# Altium PCB BQ51013BPCB.PcbDoc
Units mil, origin at the board's own origin, x right, y up, seen from the top; angles counter-clockwise.
Board outline 1016.7 x 608.18 mil, 2 copper layers (Top Layer, Bottom Layer); 31 components, 18 nets, 92 pads, 58 vias.
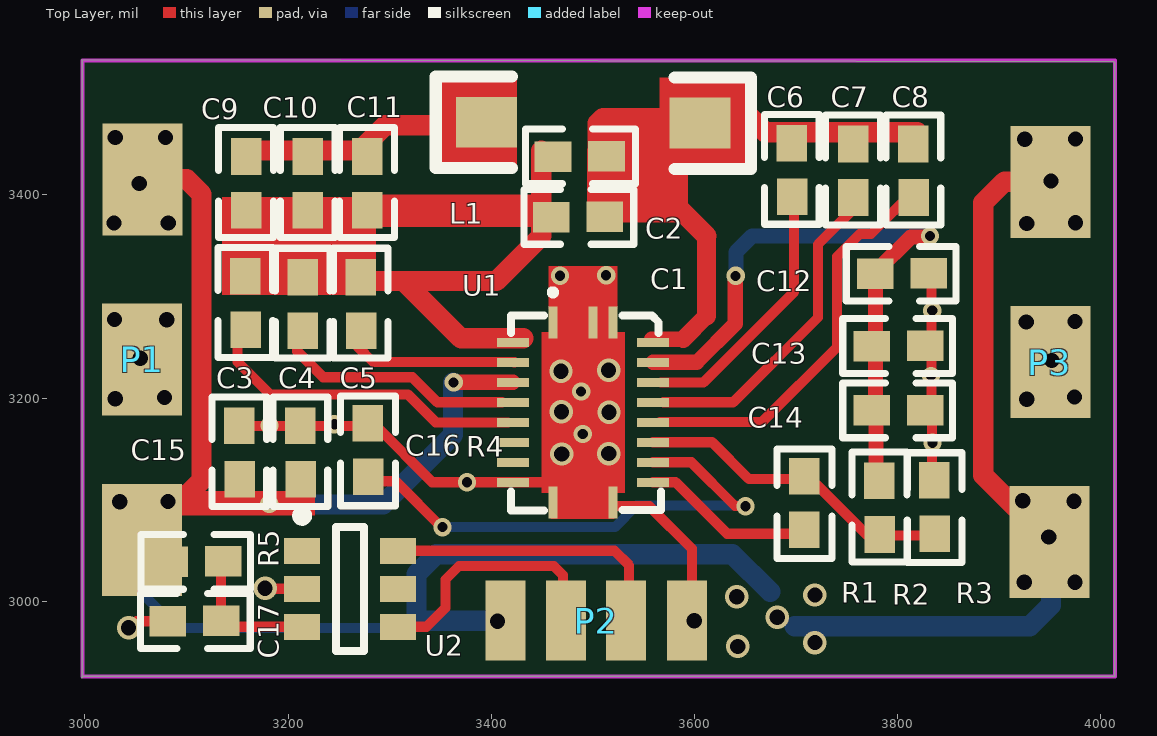
[diagram p0: Top Layer view]
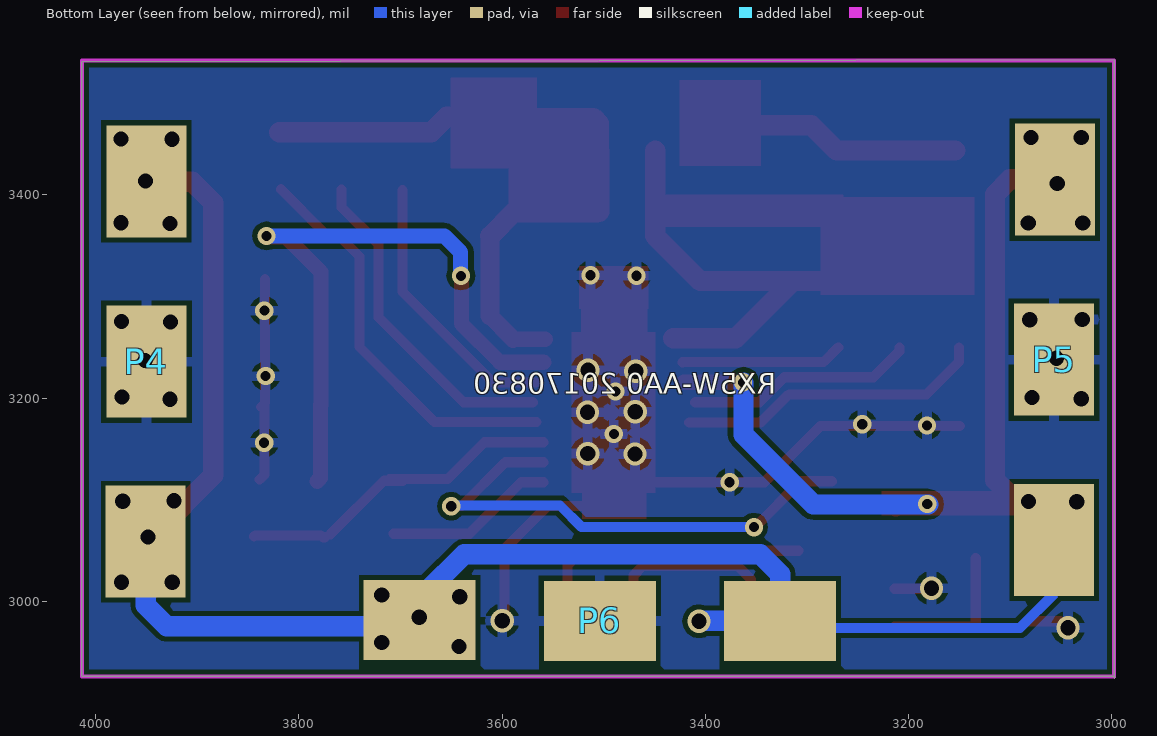
[diagram p1: Bottom Layer view, seen from below]

## Layer stack, top to bottom
Top Layer: signal copper 1.4
Dielectric: dielectric 12.6, FR-4, Dk 4.8
Bottom Layer: signal copper 1.4

## Board outline
2997.32,3532.95 2997.32,2925.07 2997.02,2924.77 2998.26,2926.01 4013.72,2926.01 4013.72,3530.32 4012.83,3531.22

## Design rules (kind name [scope] priority, off if disabled: settings)
Clearance [All] p1: gap=5
ComponentClearance [All] p1 off: gap=1 collisioncheckmode=3 verticalgap=1 showdistances=FALSE
HoleToHoleClearance [All] p1: gap=2 allowstackedmicrovias=TRUE
MinimumSolderMaskSliver [All] p1: minsoldermaskwidth=2
PolygonConnect [All] p1: connectstyle=Relief reliefconductorwidth=10 reliefentries=4 polygonreliefangle="90 Angle"
RoutingVias [All] p1: holewidth=10 width=30 viastyle="Through Hole" minholewidth=1 minwidth=1 maxholewidth=28 maxwidth=50
SilkToSilkClearance [All] p1: silktosilkclearance=0
SilkscreenOverComponentPads [All] p1: minsilkscreentomaskgap=0
SolderMaskExpansion [All] p1: expansion=4
Width [All] p1: maxlimit=50 minlimit=2 preferedwidth=10
23 further rules are at their usual default settings.

## Components (designator, comment, footprint, x,y, rotation, side; value= is the part's Value field where it differs from the comment)
C1 "182" 0603 3458.8,3378.41 r270 top
C2 "100" 0603 3460.37,3438.01 r270 top
C3 "223" 0603 3157.91,3266.64 r0 top
C4 "474" 0603 3214.43,3266.02 r0 top
C5 "103" 0603 3271.55,3266.02 r0 top
C6 "103" 0603 3695.85,3397.59 r0 top
C7 "103" 0603 3756.18,3397.02 r0 top
C8 "103" 0603 3815.38,3397.02 r0 top
C9 "683" 0603 3158.73,3384.67 r0 top
C10 "683" 0603 3219.35,3384.67 r0 top
C11 "473" 0603 3277.76,3384.67 r0 top
C12 "104" 0603 3830.88,3322.39 r90 top
C13 "104" 0603 3827.47,3251.26 r90 top
C14 "106" 0603 3827.44,3187.99 r90 top
C15 "106" 0603 3152.06,3119.76 r0 top
C16 "104" 0603 3212.06,3119.76 r0 top
C17 "104" 0603 3081.35,2980.66 r270 top
L1 "Inductor" 5vinc 3502.01,3470.09 r180 top
P1 "Header 3" RXConnect 2994.04,3230.63 r180 top
P2 "Header 4" USB_CONNECT 3492.86,2995.86 r180 top
P3 "Header 3" RXConnect 4012.42,3242.81 r0 top
P4 "Header 3" RXConnect 3887.98,3243.3 r180 bottom
P5 "Header 3" RXConnect 3118.9,3230.33 r0 bottom
P6 "Header 3" RXConnect 3496.45,2918.6 r270 bottom
R1 "51" 0603 3708.25,3123.56 r180 top
R2 "30.9K" 0603 3782.08,3065.36 r0 top
R3 "187" 0603 3836.49,3119.65 r180 top
R4 "10K" 0603 3278.77,3175.56 r180 top
R5 "10K" 0603 3136.62,3038.9 r90 top
U1 "BQ51013B" PVQFN-N20 3421.49,3254.83 r270 top
U2 "U?" SOT23-6_L 3261.09,3012.32 r0 top

## Footprints (in the part's own frame and the unit in brackets; to place one, negate y for a bottom-side part, rotate by r counter-clockwise, add the part's x,y. Pads: shape width x height; smd on the part's side, far side on the other; paste and mask are expansions set on the pad)
5vinc [mil]
  rect 60x50 smd: 1(-103.55,-0.53) 2(106.66,-1.31)
  silkscreen extent -154,-46 157,44
0603 [mil]
  rect 30x36 smd: 1(0.28,0.42) 2(-0.01,53.09)
  silkscreen extent -27,-27 27,82
PVQFN-N20 [mm]
  rect 0.8x0.23 smd: 1(-0.5,1) 10(4,1) 11(4,2.5) 20(-0.5,2.5) 21(-0.5,2)
  rect 0.23x0.8 smd: 2(0,0) 3(0.5,0) 4(1,0) 5(1.5,0) 6(2,0) 7(2.5,0) 8(3,0) 9(3.5,0) 12(3.5,3.5) 13(3,3.5) 14(2.5,3.5) 15(2,3.5) 16(1.5,3.5) 17(1,3.5) 18(0.5,3.5) 19(0,3.5)
  silkscreen extent -1.3,-0.06 4.2,3.7
RXConnect [mm]
  rect 2x2.8 smd: 1(-1.58,4.32) 2(-1.577,-0.189) 3(-1.599,-4.691)
SOT23-6_L [mm] "SOT23, 6-Leads, Body 2.9x1.6mm, Pitch 0.95mm, Lead Span 2.7mm, IPC High Density"
  rect 0.9x0.65 smd: 1(-1.2,0.95) 2(-1.2,0) 3(-1.2,-0.95) 4(1.2,-0.95) 5(1.2,0) 6(1.2,0.95)
  silkscreen extent -1.32,-1.55 0.35,1.95, body extent -0.9,-1.55 0.9,1.55, height 1.45
USB_CONNECT [mm]
  rect 1x2 smd: 1(-2.53,0.372) 2(-1.016,0.381) 3(0.492,0.371) 4(1.997,0.381)

## Part data
C1 C2 C3 C4 C5 C6 C7 C8 C9 C10 C11 C12 C13 C14 C15 C16 C17: library part CAP1, "Capacitor"
P1 P3 P4 P5 P6: "Header, 3-Pin"
P2: "Header, 4-Pin"
R1 R2 R3 R4 R5: library part RE, "电?"
U2: library part RH7901A, "RH7019A"

## Via types
v1: diameter 23, hole 15, Top Layer to Bottom Layer, 42 vias
v2: diameter 18, hole 10, Top Layer to Bottom Layer, 16 vias

## Nets (pads, with @x,y where several pads share a name; then routed paths per layer and width w, separated by ;. In a path a pad name is that pad's centre, name@x,y a point inside that pad or via, vN(x,y) a via of type N, cw(c..) or ccw(c..) an arc to the next point about the centre after c; other vN are vias at no path point)
AC1: C1.1 C2.1 C3.2 C4.2 C5.2 C9.1 C10.1 C11.1 U1.2 | length 435
  Top Layer w20: C5.2@3281.99,3315.16 3314,3315.16 3370.19,3258.98 U1.2@3431.79,3258.98 ; 3289.76,3315.16 3405.07,3315.16 3449.37,3359.45 C2.1@3449.37,3443.41
AC2: C1.2 C2.2 C6.2 C7.2 C8.2 L1.1 U1.19 | length 676.6
  Top Layer w15: U1.19@3557.68,3258.01 3589.03,3258.01
  Top Layer w17: 3589.03,3258.01 3611.9,3280.88
  Top Layer w19: 3611.9,3280.88 3611.9,3359.46
  Top Layer w20: C1.2@3504.37,3383.22 C2.2@3504.37,3443.41 ; C2.2@3504.89,3434.64 3504.89,3470.59 3510.02,3475.71 3579.87,3475.71 3581.1,3476.94 3654.49,3476.94 3669.72,3461.72 C8.2@3819.35,3461.72 ; C1.2@3506.75,3382.78 3588.58,3382.78 3611.9,3359.46
BOOT1: C5.1 U1.3 | length 159.5
  Top Layer w10: C5.1@3269.18,3249.88 3283.6,3235.45 3422.49,3235.45 U1.3@3422.61,3235.33
BOOT2: C6.1 U1.17 | length 268.1
  Top Layer w10: U1.17@3566.93,3215.47 3609.03,3215.47 3698.13,3304.57 C6.1@3698.13,3404.6
CLMP1: C4.1 U1.5 | length 225.9
  Top Layer w10: C4.1@3209.07,3249.88 3209.07,3246.1 3234.71,3220.45 3322.4,3220.45 3346.99,3195.86 U1.5@3410.33,3195.86
CLMP2: C7.1 U1.16 | length 327.3
  Top Layer w10: U1.16@3569.79,3195.83 3638.12,3195.83 3721.58,3279.3 3721.58,3351.31 3758.17,3387.9 C7.1@3758.17,3405.05
COM1: C3.1 U1.6 | length 304.9
  Top Layer w10: C3.1@3150.27,3249.88 3150.27,3235.67 3182.27,3203.67 3317.79,3203.67 3345.37,3176.08 U1.6@3416.23,3176.08
COM2: C8.1 U1.15 | length 398.8
  Top Layer w10: U1.15@3566.11,3176.6 3666.76,3176.6 3740.4,3250.25 3740.4,3339.39 3762.55,3361.53 3773.8,3361.53 3817.72,3405.46 C8.1@3817.72,3405.59
FOD: R1.1 R2.1 R3.2 U1.14 | length 327.7
  Top Layer w10: U1.14@3559.15,3156.55 3617.37,3156.55 3653.55,3120.37 R1.1@3710.98,3120.37 ; R1.1@3697.63,3118.71 3716.32,3118.71 R2.1@3769.17,3065.85 ; R2.1@3774.6,3063 R2.1@3776.03,3063 ; R2.1@3778.5,3064.78 3843.4,3064.78 R3.2@3844.18,3064.01
GND: C12.1 C13.1 C14.1 C15.2 C16.2 C17.1 P1.2 P2.1 P3.2 P4.2 P5.2 P6.2 R3.1 R4.1 U1.1 U1.9 U1.10 U1.11 U1.20 U1.21 U2.2 | length 802.9
  Top Layer w10: v1@3043.29,2972.72 3050.96,2980.38 C17.1 ; C15.2@3149.35,3172.62 3245.62,3172.62 3286.56,3172.62 3342,3117.18 U1.9@3420.93,3117.18 ; v1@3177.59,3012.32 U2.2 ; U1.9@3421.36,3117.18 3457.24,3117.18 3465.58,3108.85 ; 3506.61,3093.64 3555.57,3093.64 3597.54,3051.67 3597.54,2985 P2.1@3601.11,2981.44 ; C12.1@3833.29,3316.93 3833.29,3251.54 3833.29,3195.14 C14.1@3837.24,3191.19 ; C14.1@3833.79,3193.17 3833.79,3124.74 R3.1@3838.68,3119.84
  other v1: 3043.05,2973.88 3599.87,2980.85 3177.45,3012.94 3469.3,3144.94 3515.74,3145.39 3515.96,3185.99 3469.08,3186.66 3029.98,3199.4 3926.96,3198.95 3078.5,3200.71 3974.17,3201.14 3468.63,3226.37 3515.51,3227.49 3951.66,3236.95 3054.46,3239.18 3926.53,3275.01 3974.61,3275.45 3029.14,3277.37 3080.69,3277.21
  other v2: 3376.12,3117.14 3834.3,3156.02 3490.04,3164.67 3181.85,3173.04 3245.62,3174.3 3488.47,3206.58 3832.79,3221.64 3834.05,3286.05 3467.73,3320.41 3513.06,3320.86
ILIM: R1.2 U1.12 | length 168.9
  Top Layer w10: U1.12@3559.15,3117.18 3581.49,3117.18 3632.26,3066.41 R1.2@3707.02,3066.41
NetC9_2: C9.2 C10.2 C11.2 L1.2 | length 258.9
  Top Layer w20: C9.2@3153.94,3443.69 3270.71,3443.69 3295.66,3468.64 3401.23,3468.64 L1.2@3402.1,3469.52
NetC17_2: C17.2 R5.1 U2.3 | length 145.7
  Top Layer w10: R5.1@3133.93,3042.77 3133.93,2978.38 3137.39,2974.92 U2.3
NetR4_2: R4.2 U1.13 | length 508.9
  Top Layer w10: R4.2@3275.56,3118.08 3306.04,3118.08 3351.42,3072.7 v2@3351.82,3072.7 ; U1.13@3559.15,3136.86 3596.87,3136.86 3639.94,3093.8 v2@3649.46,3093.8
  Bottom Layer w10: v2(3352.13,3072.99) 3521.78,3072.99 3543.01,3094.22 v2@3649.07,3094.22
  other v2: 3650.16,3093.57
OUT5V: C15.1 C16.1 P1.1 P1.3 P2.4 P3.1 P3.3 P4.1 P4.3 P5.1 P5.3 P6.1 P6.3 R5.2 U1.4 | length 2383.1
  Top Layer w15: v2@3363.32,3215.6 U1.4@3421.36,3215.6
  Top Layer w20: P1.3 3100.39,3415.29 3114.89,3400.79 3114.89,3119.25 P1.1@3092.02,3096.38 ; 3147.4,3095.94 3210.34,3095.94 3212.73,3093.56 ; P3.3@3941.66,3066.61 3884.33,3123.94 3884.33,3392.12 3905.09,3412.88 P3.1 ; P3.3@3941.9,3013.82 P3.3@3941.9,3071.71
  Bottom Layer w10: P5.1 3056.72,3007.56 3090.59,2973.68 P6.1@3306.08,2973.68
  Bottom Layer w20: v2@3180.5,3095.33 3293.85,3095.33 3362.44,3163.92 v2@3362.44,3215.41 ; v1@3406.43,2980.33 3405.97,2980.79 P6.1 3326.38,3026.76 3346,3046.38 3637.37,3046.38 P6.3@3674.48,3009.27 ; P6.3@3698.42,2975.43 3930.14,2975.43 3950.92,2996.21 P4.3
  other v1: 3642.6,2955.6 3718.57,2959.35 3406.21,2980.33 3681.52,2984.2 3641.66,3004.37 3718.57,3006.25 3924.65,3018.66 3974.64,3018.66 3948.68,3063.23 3034.45,3097.98 3081.84,3098.21 3923.1,3098.89 3973.48,3098.5 3028.64,3372.33 3082.19,3372.33 3926.97,3371.74 3975.03,3372.52 3053.65,3411.09 3951,3413.6 3925.03,3454.68 3975.03,3455.07 3030.05,3456.54 3079.37,3456.54
  other v2: 3181.63,3095.67 3362.98,3215.51
RECT: C12.2 C13.2 C14.2 R2.2 U1.18 | length 641.9
  Top Layer w15: U1.18@3559.15,3235.29 3602.29,3235.29 3640.1,3273.11 v2@3640.1,3320.97 ; C14.2@3778.29,3193.12 3778.29,3324.02 3812.94,3358.67 v2@3832.35,3358.67 ; C14.2@3778.79,3193.17 3778.79,3121.47 R2.2@3782.04,3118.21
  Bottom Layer w15: v2@3640.89,3319.41 3640.89,3343.66 3656.83,3359.6 v2(3831.88,3359.6)
  other v2: 3640.58,3320.3
USB_DM: P2.2 U2.6 | length 267.6
  Top Layer w10: U2.6 3521.36,3049.72 3535.68,3035.4 P2.2@3535.68,3001.03
USB_DP: P2.3 U2.4 | length 234.1
  Top Layer w10: U2.4 3336.33,2974.92 3354.98,2993.56 3354.98,3021.44 3368.25,3034.72 3461.55,3034.72 3470.63,3025.63 P2.3@3470.63,2998.72
pads on no net: U1.7 U1.8 U2.1 U2.5

## Polygon pours and split planes (outlines as drawn)
GND on Bottom Layer "TopLayer-No Net" (solid, remove dead copper, pour order 3): 2997.57,3532.69 2996.75,3531.87 2996.75,2924.49 4010.97,2924.49 4013.81,2927.33 4013.4,2927.73 4013.4,3531.47

## Keep-outs
Keep-Out Layer:
  lines w3.94: 2997.72,2925.79 4013.7,2925.79 4013.7,3532.05 2997.72,3532.05 2997.72,2925.79

## Other copper
Top Layer:
  rectangle net AC2: 3565.68,3426.17 3650.82,3515.78
  rectangle net NetC9_2: 3345,3428.55 3425.28,3513.2
  rectangle net GND: 3449.31,3106.58 3531.74,3264.82
  rectangle net AC2: 3504.23,3379.05 3593.59,3479.04
  rectangle net AC1: 3264.03,3368.53 3454.12,3400.43
  rectangle net GND: 3456.14,3287.83 3524.44,3329.8
  rectangle net GND: 3458.14,3080.89 3521.37,3110.28
  rectangle net GND: 3457.13,3261.59 3522.38,3288.66
  rectangle net OUT5V: 3073.52,3084.44 3226.63,3108.38
  rectangle net AC1: 3135.23,3301.65 3286.78,3398.14

## Silkscreen, mask and mechanical layers (free items; w line width, h text height)
Bottom Overlay:
  text "RX5W-AA0 20170830" at 3330.28,3204.35 h20
Top Solder:
  rectangle: 3565.38,3427.61 3653.6,3515.16
  rectangle: 3349.96,3428.6 3426.61,3510.54
Mechanical 15:
  lines w3.94: 2916.24,3231.98 4037.83,3231.98 ; 3501.74,2855.16 3501.74,3572.92